# Altium PCB PDB - PCB.PcbDoc
Units mil, origin at the board's own origin, x right, y up, seen from the top; angles counter-clockwise.
Board outline 6000 x 4000 mil, 2 copper layers (Top Layer, Bottom Layer); 27 components, 15 nets, 89 pads, 0 vias.
Unrouted connection lines stored in the file: 54.
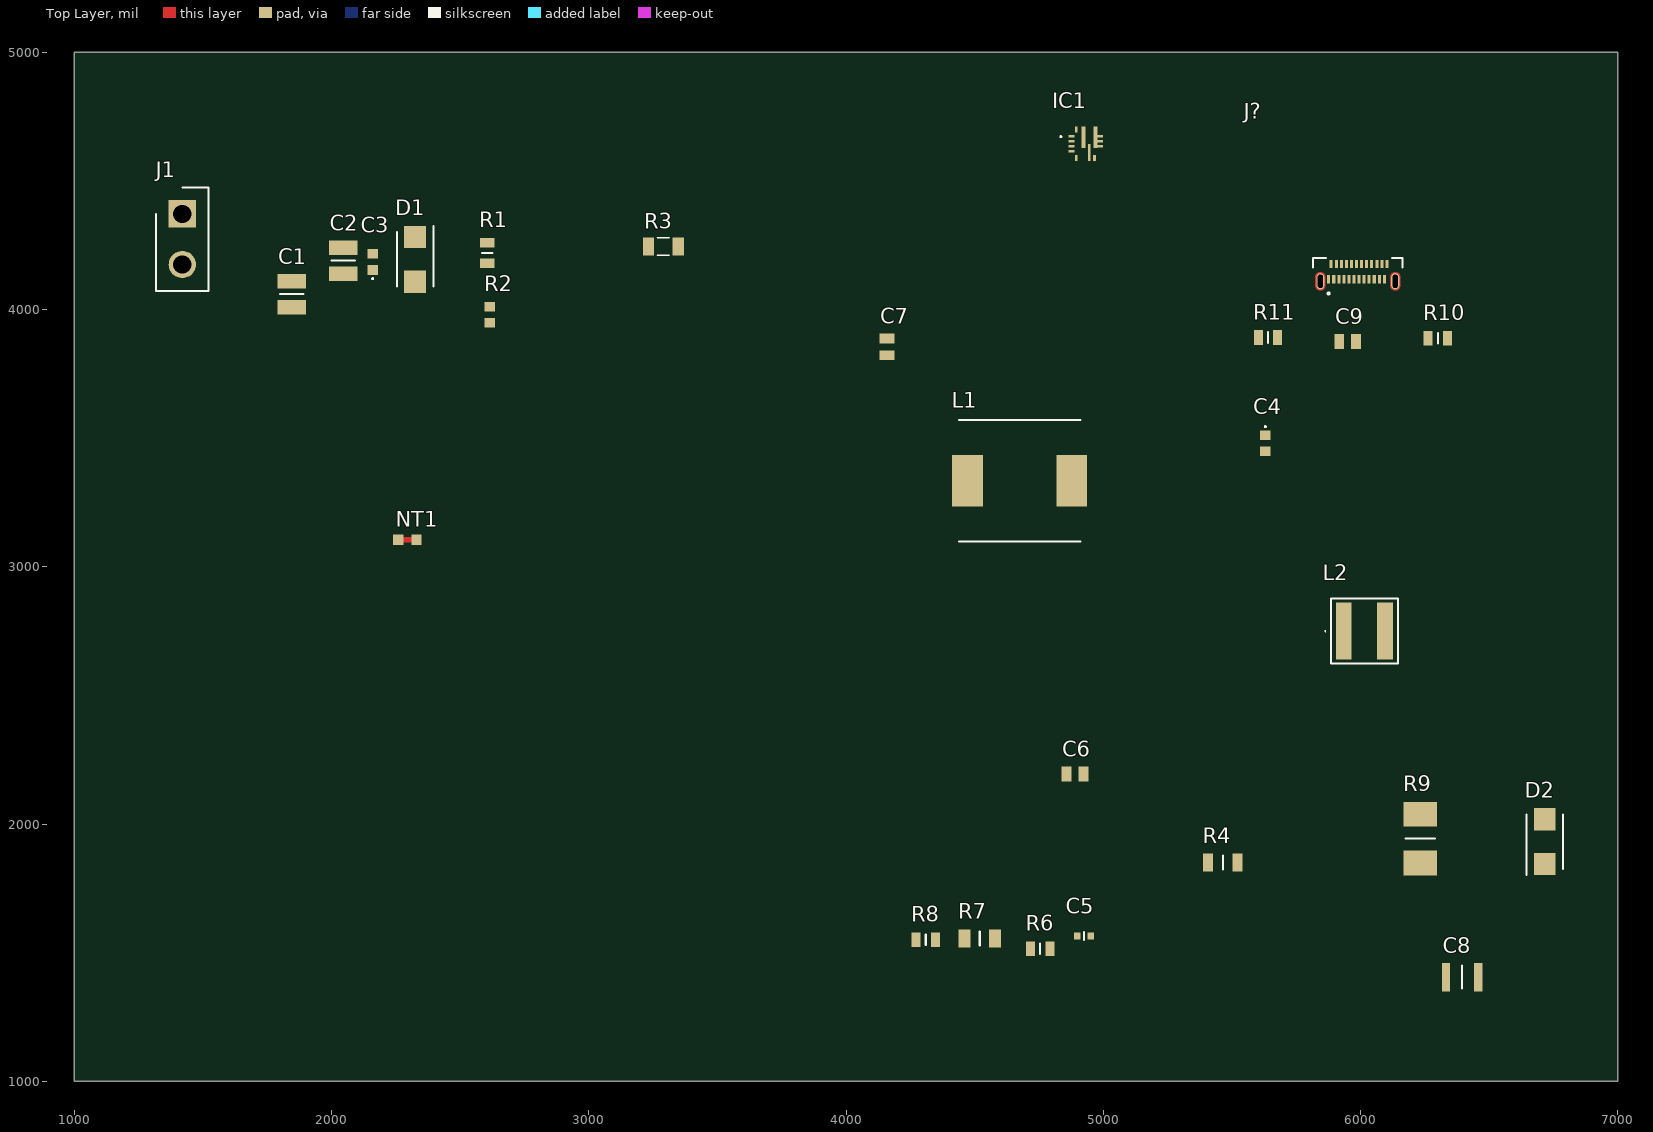
[diagram p0: Top Layer view]
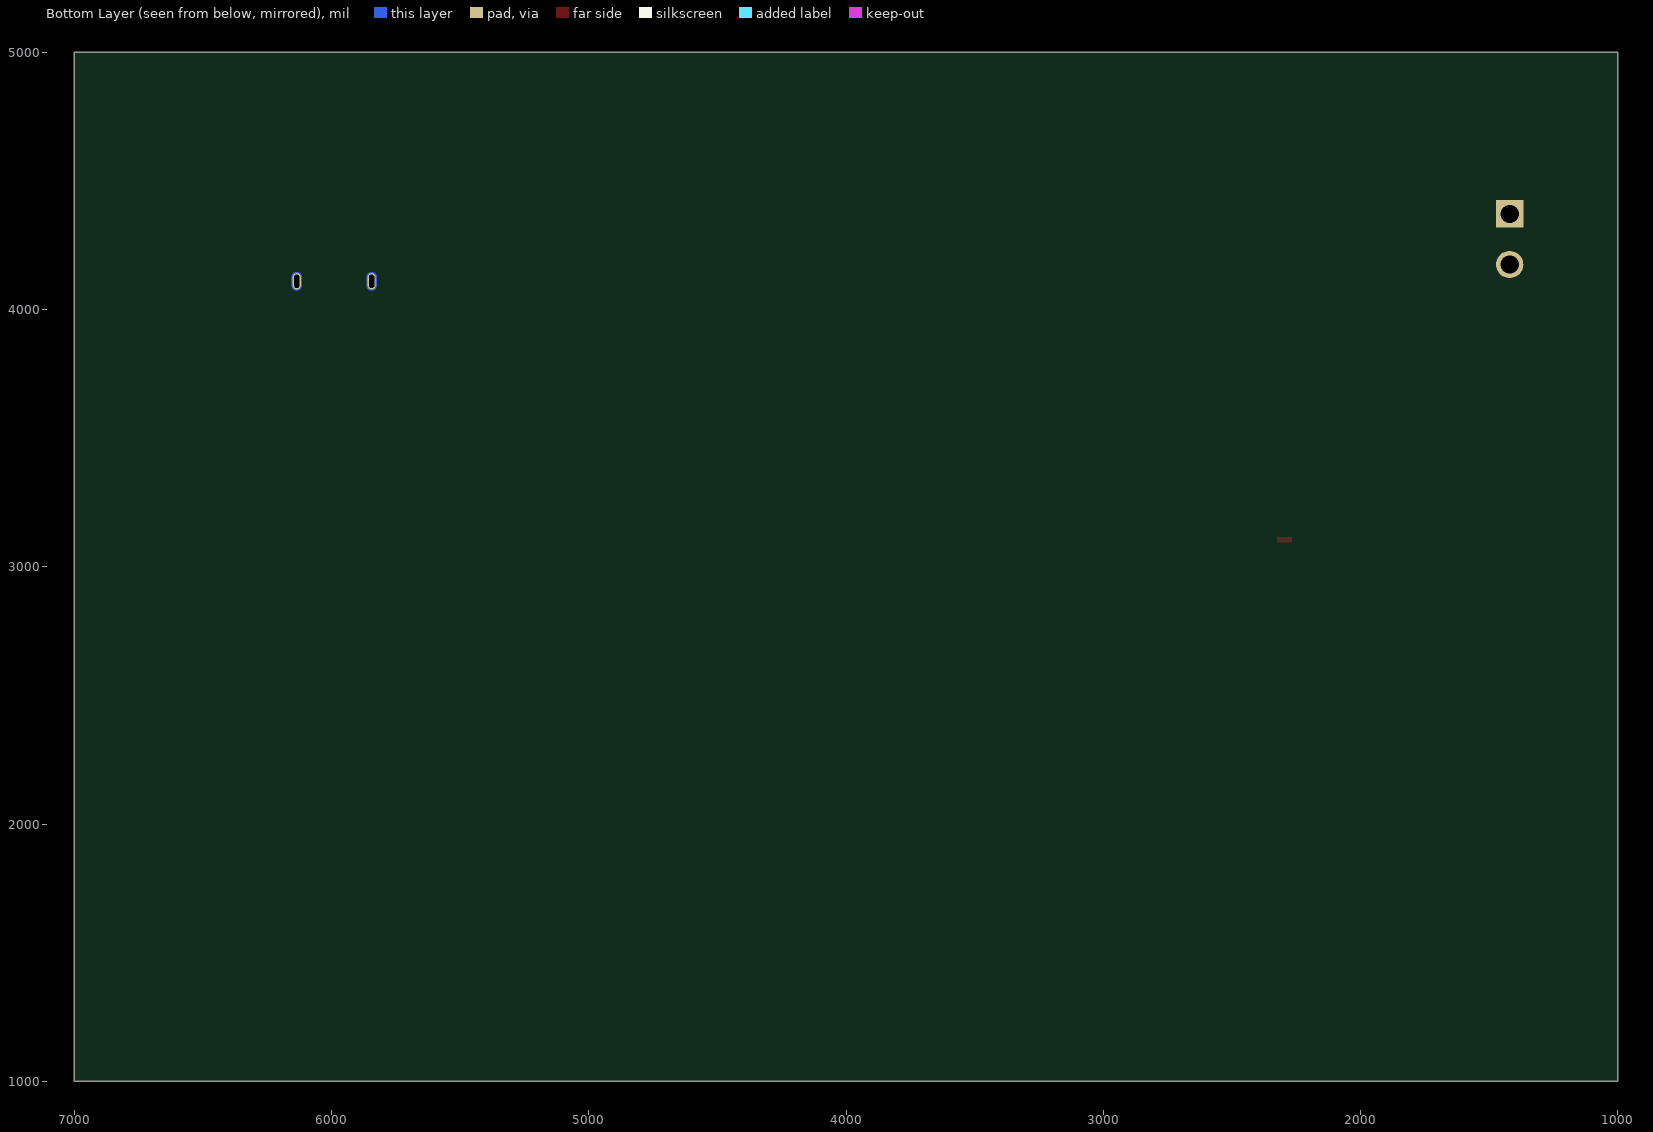
[diagram p1: Bottom Layer view, seen from below]

## Layer stack, top to bottom
Top Solder: solder mask 0.4, Solder Resist, Dk 3.5
Top Layer: signal copper 1.4
Dielectric 1: dielectric 12.6, FR-4, Dk 4.8
Bottom Layer: signal copper 1.4
Bottom Solder: solder mask 0.4, Solder Resist, Dk 3.5

## Board outline
1000,1000 7000,1000 7000,5000 1000,5000

## Design rules (kind name [scope] priority, off if disabled: settings)
Clearance [All] p1: gap=10 ignorepadtopadclearanceinfootprint=FALSE
PolygonConnect [All] p1: connectstyle=Relief reliefconductorwidth=10 reliefentries=4 polygonreliefangle="90 Angle" airgapwidth=10
RoutingVias [All] p1: holewidth=28 width=50 viastyle="Through Hole" minholewidth=28 minwidth=50 maxholewidth=28 maxwidth=50
SolderMaskExpansion [All] p1: expansion=4 istentingtop=FALSE
SupplyNets "Schematic Supply Nets" [InNet('VCC')] p1: voltage=0.000
Width [All] p1: maxlimit=10 minlimit=10 preferedwidth=10
30 further rules are at their usual default settings.

## Components (designator, comment, footprint, x,y, rotation, side; value= is the part's Value field where it differs from the comment)
C1 "10uF" CAPC3225X280N 1845,4060 r90 top
C2 "10uF" CAPC3225X280N 2045,4190 r90 top
C3 "0.1uF" C0603 2160,4185 r90 top
C4 "0.1uF" C0603 5630,3480 r270 top
C5 "100pF" GRM1885C1H101JA01D 4925,1565 r0 top
C6 "22uF" CAPC2012X145N 4890,2195 r0 top
C7 "22uF" CAPC2012X145N 4160,3855 r90 top
C8 "1.5uF" CAPC3225X200N 6395,1405 r0 top
C9 "22uF" CAPC2012X145N 5949.9,3875.7 r0 top
D1 "Diode" DIOM5436X244N 2325,4195 r270 top
D2 "Diode" DIOM5436X244N 6716.1,1931.4 r90 top
IC1 "TPS56637RPAR" TPS56637RPAR 4931.83,4644.46 r0 top
J1 "XT30UPB-M" SHDR2W160P0X500_1X2_1020X520X1070P 1420,4371.85 r270 top
J? "USB4155-03-C_REVA" GCT_USB4155-03-C_REVA 5989.59,4147.17 r180 top
L1 "4.6uH" INDM120120X800N 4675,3335 r0 top
L2 "6.8uH" ASPIF60606R8MT 6015.28,2750 r0 top
NT1 "NetTie" NetTie 2295,3105 r180 top net-tie
R1 "169k" RESC2012X50N 2605,4220 r90 top
R2 "36.1k" RESC1608X51N 2615,3980 r90 top
R3 "100k" RESC3216X71N 3290,4245 r0 top
R4 "49.9" RESC3016X65N 5465,1850 r0 top
R6 "20k" RESC2012X60N 4755,1515 r0 top
R7 "75k" RESC3216X75N 4520,1555 r0 top
R8 "10k" RESC2012X60N 4310,1550 r0 top
R9 "1.5" RESC6331X80N 6232.5,1943.1 r90 top
R10 "10k" RESC2012X60N 6300.6,3887.9 r0 top
R11 "10k" RESC2012X60N 5640.4,3891 r0 top

## Footprints (in the part's own frame and the unit in brackets; to place one, negate y for a bottom-side part, rotate by r counter-clockwise, add the part's x,y. Pads: shape width x height; smd on the part's side, far side on the other; paste and mask are expansions set on the pad)
ASPIF60606R8MT [mm]
  rect 1.55x5.6 smd: 1(-2.025,0) 2(2.025,0)
  silkscreen extent -3.9,-3.2 3.3,3.2, body extent -3.3,-3.2 3.3,3.2, height 6.1
C0603 [mm]
  rect 0.95x1 smd: 1(-0.8,0) 2(0.8,0)
  silkscreen extent -1.7,-0.05 -1.6,0.05, body extent -0.87,-0.48 0.88,0.47, height 0.87
CAPC2012X145N [mm]
  rect 0.97x1.47 smd: 1(-0.83,0) 2(0.83,0)
  body extent -1,-0.63 1,0.63, height 1.45
CAPC3225X200N [mm]
  rect 0.81x2.82 smd: 1(-1.6,0) 2(1.6,0)
  silkscreen extent 0,-1.15 0,1.15, body extent -1.6,-1.25 1.6,1.25, height 2.5
CAPC3225X280N [mm]
  rect 1.43x2.82 smd: 1(-1.29,0) 2(1.29,0)
  silkscreen extent 0,-1.15 0,1.15, body extent -1.6,-1.25 1.6,1.25, height 2.8
DIOM5436X244N [mm]
  rect 2.2x2.15 smd: 1(-2.2,0) 2(2.2,0)
  silkscreen extent -3.27,-1.81 2.7,1.81, body extent -2.7,-1.81 2.7,1.81, height 2.31
GCT_USB4155-03-C_REVA [mm]
  rect 0.3x0.8 smd: A1(2.875,0.75) A2(2.375,0.75) A3(1.875,0.75) A4(1.375,0.75) A5(0.875,0.75) A6(0.375,0.75) A7(-0.125,0.75) A8(-0.625,0.75) A9(-1.125,0.75) A10(-1.625,0.75) A11(-2.125,0.75) A12(-2.625,0.75) B1(-2.875,-0.75) B2(-2.375,-0.75) B3(-1.875,-0.75) B4(-1.375,-0.75) B5(-0.875,-0.75) B6(-0.375,-0.75) B7(0.125,-0.75) B8(0.625,-0.75) B9(1.125,-0.75) B10(1.625,-0.75) B11(2.125,-0.75) B12(2.625,-0.75)
  oval 0.8x1.6 hole 0.5 slot 1.3 at 90 deg mask+0: S1(-3.7,0.95) S2(3.7,0.95)
  Top Layer region: -3.674,1.849 -3.648,1.847 -3.622,1.844 -3.596,1.839 -3.571,1.833 -3.545,1.826 -3.521,1.817 -3.497,1.807 -3.473,1.796 -3.45,1.783 -3.428,1.769 -3.406,1.755 -3.385,1.739 -3.365,1.722 -3.346,1.704 -3.328,1.685 -3.311,1.665 -3.295,1.644 -3.281,1.622 -3.267,1.6 -3.254,1.577 -3.243,1.553 -3.233,1.529 -3.224,1.505 -3.217,1.479 -3.211,1.454 -3.206,1.428 -3.203,1.402 -3.201,1.376 -3.2,1.35 -3.2,0.55 -3.201,0.524 -3.203,0.498 -3.206,0.472 -3.211,0.446 -3.217,0.421 -3.224,0.395 -3.233,0.371 -3.243,0.347 -3.254,0.323 -3.267,0.3 -3.281,0.278 -3.295,0.256 -3.311,0.235 -3.328,0.215 -3.346,0.196 -3.365,0.178 -3.385,0.161 -3.406,0.145 -3.428,0.131 -3.45,0.117 -3.473,0.104 -3.497,0.093 -3.521,0.083 -3.545,0.074 -3.571,0.067 -3.596,0.061 -3.622,0.056 -3.648,0.053 -3.674,0.051 -3.7,0.05 -3.726,0.051 -3.752,0.053 -3.778,0.056 -3.804,0.061 -3.829,0.067 -3.855,0.074 -3.879,0.083 -3.903,0.093 -3.927,0.104 -3.95,0.117 -3.972,0.131 -3.994,0.145 -4.015,0.161 -4.035,0.178 -4.054,0.196 -4.072,0.215 -4.089,0.235 -4.105,0.256 -4.119,0.278 -4.133,0.3 -4.146,0.323 -4.157,0.347 -4.167,0.371 -4.176,0.395 -4.183,0.421 -4.189,0.446 -4.194,0.472 -4.197,0.498 -4.199,0.524 -4.2,0.55 -4.2,1.35 -4.199,1.376 -4.197,1.402 -4.194,1.428 -4.189,1.454 -4.183,1.479 -4.176,1.505 -4.167,1.529 -4.157,1.553 -4.146,1.577 -4.133,1.6 -4.119,1.622 -4.105,1.644 -4.089,1.665 -4.072,1.685 -4.054,1.704 -4.035,1.722 -4.015,1.739 -3.994,1.755 -3.972,1.769 -3.95,1.783 -3.927,1.796 -3.903,1.807 -3.879,1.817 -3.855,1.826 -3.829,1.833 -3.804,1.839 -3.778,1.844 -3.752,1.847 -3.726,1.849 -3.7,1.85
  Top Layer region: 3.726,1.849 3.752,1.847 3.778,1.844 3.804,1.839 3.829,1.833 3.855,1.826 3.879,1.817 3.903,1.807 3.927,1.796 3.95,1.783 3.972,1.769 3.994,1.755 4.015,1.739 4.035,1.722 4.054,1.704 4.072,1.685 4.089,1.665 4.105,1.644 4.119,1.622 4.133,1.6 4.146,1.577 4.157,1.553 4.167,1.529 4.176,1.505 4.183,1.479 4.189,1.454 4.194,1.428 4.197,1.402 4.199,1.376 4.2,1.35 4.2,0.55 4.199,0.524 4.197,0.498 4.194,0.472 4.189,0.446 4.183,0.421 4.176,0.395 4.167,0.371 4.157,0.347 4.146,0.323 4.133,0.3 4.119,0.278 4.105,0.256 4.089,0.235 4.072,0.215 4.054,0.196 4.035,0.178 4.015,0.161 3.994,0.145 3.972,0.131 3.95,0.117 3.927,0.104 3.903,0.093 3.879,0.083 3.855,0.074 3.829,0.067 3.804,0.061 3.778,0.056 3.752,0.053 3.726,0.051 3.7,0.05 3.674,0.051 3.648,0.053 3.622,0.056 3.596,0.061 3.571,0.067 3.545,0.074 3.521,0.083 3.497,0.093 3.473,0.104 3.45,0.117 3.428,0.131 3.406,0.145 3.385,0.161 3.365,0.178 3.346,0.196 3.328,0.215 3.311,0.235 3.295,0.256 3.281,0.278 3.267,0.3 3.254,0.323 3.243,0.347 3.233,0.371 3.224,0.395 3.217,0.421 3.211,0.446 3.206,0.472 3.203,0.498 3.201,0.524 3.2,0.55 3.2,1.35 3.201,1.376 3.203,1.402 3.206,1.428 3.211,1.454 3.217,1.479 3.224,1.505 3.233,1.529 3.243,1.553 3.254,1.577 3.267,1.6 3.281,1.622 3.295,1.644 3.311,1.665 3.328,1.685 3.346,1.704 3.365,1.722 3.385,1.739 3.406,1.755 3.428,1.769 3.45,1.783 3.473,1.796 3.497,1.807 3.521,1.817 3.545,1.826 3.571,1.833 3.596,1.839 3.622,1.844 3.648,1.847 3.674,1.849 3.7,1.85
  Bottom Layer region: -3.674,1.849 -3.648,1.847 -3.622,1.844 -3.596,1.839 -3.571,1.833 -3.545,1.826 -3.521,1.817 -3.497,1.807 -3.473,1.796 -3.45,1.783 -3.428,1.769 -3.406,1.755 -3.385,1.739 -3.365,1.722 -3.346,1.704 -3.328,1.685 -3.311,1.665 -3.295,1.644 -3.281,1.622 -3.267,1.6 -3.254,1.577 -3.243,1.553 -3.233,1.529 -3.224,1.505 -3.217,1.479 -3.211,1.454 -3.206,1.428 -3.203,1.402 -3.201,1.376 -3.2,1.35 -3.2,0.55 -3.201,0.524 -3.203,0.498 -3.206,0.472 -3.211,0.446 -3.217,0.421 -3.224,0.395 -3.233,0.371 -3.243,0.347 -3.254,0.323 -3.267,0.3 -3.281,0.278 -3.295,0.256 -3.311,0.235 -3.328,0.215 -3.346,0.196 -3.365,0.178 -3.385,0.161 -3.406,0.145 -3.428,0.131 -3.45,0.117 -3.473,0.104 -3.497,0.093 -3.521,0.083 -3.545,0.074 -3.571,0.067 -3.596,0.061 -3.622,0.056 -3.648,0.053 -3.674,0.051 -3.7,0.05 -3.726,0.051 -3.752,0.053 -3.778,0.056 -3.804,0.061 -3.829,0.067 -3.855,0.074 -3.879,0.083 -3.903,0.093 -3.927,0.104 -3.95,0.117 -3.972,0.131 -3.994,0.145 -4.015,0.161 -4.035,0.178 -4.054,0.196 -4.072,0.215 -4.089,0.235 -4.105,0.256 -4.119,0.278 -4.133,0.3 -4.146,0.323 -4.157,0.347 -4.167,0.371 -4.176,0.395 -4.183,0.421 -4.189,0.446 -4.194,0.472 -4.197,0.498 -4.199,0.524 -4.2,0.55 -4.2,1.35 -4.199,1.376 -4.197,1.402 -4.194,1.428 -4.189,1.454 -4.183,1.479 -4.176,1.505 -4.167,1.529 -4.157,1.553 -4.146,1.577 -4.133,1.6 -4.119,1.622 -4.105,1.644 -4.089,1.665 -4.072,1.685 -4.054,1.704 -4.035,1.722 -4.015,1.739 -3.994,1.755 -3.972,1.769 -3.95,1.783 -3.927,1.796 -3.903,1.807 -3.879,1.817 -3.855,1.826 -3.829,1.833 -3.804,1.839 -3.778,1.844 -3.752,1.847 -3.726,1.849 -3.7,1.85
  Bottom Layer region: 3.726,1.849 3.752,1.847 3.778,1.844 3.804,1.839 3.829,1.833 3.855,1.826 3.879,1.817 3.903,1.807 3.927,1.796 3.95,1.783 3.972,1.769 3.994,1.755 4.015,1.739 4.035,1.722 4.054,1.704 4.072,1.685 4.089,1.665 4.105,1.644 4.119,1.622 4.133,1.6 4.146,1.577 4.157,1.553 4.167,1.529 4.176,1.505 4.183,1.479 4.189,1.454 4.194,1.428 4.197,1.402 4.199,1.376 4.2,1.35 4.2,0.55 4.199,0.524 4.197,0.498 4.194,0.472 4.189,0.446 4.183,0.421 4.176,0.395 4.167,0.371 4.157,0.347 4.146,0.323 4.133,0.3 4.119,0.278 4.105,0.256 4.089,0.235 4.072,0.215 4.054,0.196 4.035,0.178 4.015,0.161 3.994,0.145 3.972,0.131 3.95,0.117 3.927,0.104 3.903,0.093 3.879,0.083 3.855,0.074 3.829,0.067 3.804,0.061 3.778,0.056 3.752,0.053 3.726,0.051 3.7,0.05 3.674,0.051 3.648,0.053 3.622,0.056 3.596,0.061 3.571,0.067 3.545,0.074 3.521,0.083 3.497,0.093 3.473,0.104 3.45,0.117 3.428,0.131 3.406,0.145 3.385,0.161 3.365,0.178 3.346,0.196 3.328,0.215 3.311,0.235 3.295,0.256 3.281,0.278 3.267,0.3 3.254,0.323 3.243,0.347 3.233,0.371 3.224,0.395 3.217,0.421 3.211,0.446 3.206,0.472 3.203,0.498 3.201,0.524 3.2,0.55 3.2,1.35 3.201,1.376 3.203,1.402 3.206,1.428 3.211,1.454 3.217,1.479 3.224,1.505 3.233,1.529 3.243,1.553 3.254,1.577 3.267,1.6 3.281,1.622 3.295,1.644 3.311,1.665 3.328,1.685 3.346,1.704 3.365,1.722 3.385,1.739 3.406,1.755 3.428,1.769 3.45,1.783 3.473,1.796 3.497,1.807 3.521,1.817 3.545,1.826 3.571,1.833 3.596,1.839 3.622,1.844 3.648,1.847 3.674,1.849 3.7,1.85
  silkscreen extent -4.4,-1.35 4.4,2.25, body extent -4.4,-14.05 4.4,1.45, height 1.45
GRM1885C1H101JA01D [mm]
  rect 0.65x0.7 smd: 1(-0.675,0) 2(0.675,0)
  silkscreen extent 0,-0.4 0,0.4, body extent -0.8,-0.45 0.8,0.45, height 0.8
INDM120120X800N [mm]
  rect 3.05x5.1 smd: 1(-5.15,0) 2(5.15,0)
  silkscreen extent -6,-6 6,6, body extent -6,-6 6,6, height 8
NetTie [mm]
  rect 1x1 smd mask-10: 1(-0.9,0) 2(0.9,0)
  Top Layer region: -0.75,-0.25 0.75,-0.25 0.75,0.25 -0.75,0.25
RESC1608X51N [mm]
  rect 0.95x1 smd: 1(-0.8,0) 2(0.8,0)
  body extent -0.81,-0.41 0.81,0.41, height 0.51
RESC2012X50N [mm]
  rect 0.95x1.45 smd: 1(-1,0) 2(1,0)
  silkscreen extent 0,-0.53 0,0.53, body extent -1.02,-0.63 1.02,0.63, height 0.5
RESC2012X60N [mm]
  rect 0.9x1.45 smd: 1(-0.95,0) 2(0.95,0)
  silkscreen extent 0,-0.53 0,0.53, body extent -1,-0.63 1,0.63, height 0.6
RESC3016X65N [mm]
  rect 1x1.75 smd: 1(-1.45,0) 2(1.45,0)
  silkscreen extent 0,-0.67 0,0.67, body extent -1.52,-0.78 1.53,0.77, height 0.55
RESC3216X71N [mil]
  rect 44x69 smd: 1(-58,0) 2(58,0)
  silkscreen extent -23,-34 23,34, body extent -61,-31 61,31, height 24
RESC3216X75N [mm]
  rect 1.2x1.8 smd: 1(-1.5,0) 2(1.5,0)
  silkscreen extent 0,-0.7 0,0.7, body extent -1.6,-0.8 1.6,0.8, height 0.75
RESC6331X80N [mm]
  rect 2.45x3.3 smd: 1(-2.4,0) 2(2.4,0)
  silkscreen extent 0,-1.45 0,1.45, body extent -3.15,-1.55 3.15,1.55, height 0.8
SHDR2W160P0X500_1X2_1020X520X1070P [mm]
  rect 2.7x2.7 hole 1.8: 1(0,0)
  round 2.7 hole 1.8: 2(5,0)
  silkscreen extent -2.6,-2.6 7.6,2.6, body extent -2.6,-2.6 7.6,2.6, height 10.7
TPS56637RPAR [mm]
  rect 0.6x0.25 smd mask+0: 1(-1.4,0.75) 2(-1.4,0.25) 3(-1.4,-0.25) 4(-1.4,-0.75)
  rect 0.25x0.6 smd mask+0: 5(-0.93,-1.4) 7(0.87,-1.4) 10(-0.93,1.4)
  rect 0.25x1.7 smd mask+0: 6(0.37,-0.85)
  rect 0.4x2.1 smd mask+0: 8(0.95,0.65) 9(-0.21,0.65)
  rect 0.56x0.25 smd mask+0: 11(1.42,-0.25) 12(1.42,0.25) 13(1.42,0.75)
  silkscreen extent -2.5,0.65 -2.4,0.75, body extent -1.55,-1.55 1.55,1.55, height 1

## Part data
C1 C2: library part AGC1210X7R500-106KNE, "Capacitor", Manufacturer_Name=Venkel, Datasheet Link=https://data.venkel.com/documents/agc-series?force=1, Height=2.8mm, Manufacturer_Part_Number=AGC1210X7R500-106KNE
C3 C4: library part C0603C104K5RACTU, "Capacitor", Manufacturer_Name=KEMET, Mouser Part Number=80-C0603C104K5R, Arrow Part Number=C0603C104K5RACTU, Arrow Price/Stock=https://www.arrow.com/en/products/c0603c104k5ractu/kemet-corporation?utm_currency=USD&region=nac, Datasheet Link=https://content.kemet.com/datasheets/KEM_C1002_X7R_SMD.pdf, Height=0.87mm, Manufacturer_Part_Number=C0603C104K5RACTU, Mouser Price/Stock=https://www.mouser.co.uk/ProductDetail/KEMET/C0603C104K5RACTU?qs=l5k%252BbMnNDkkVcnZPSAaaiQ%3D%3D
C5: library part GRM1885C1H101JA01D, "Capacitor", Manufacturer_Name="Murata Electronics", Mouser Part Number=81-GRM39C101J50, Arrow Part Number=GRM1885C1H101JA01D, Arrow Price/Stock=https://www.arrow.com/en/products/grm1885c1h101ja01d/murata-manufacturing?utm_currency=USD&region=europe, Datasheet Link=https://search.murata.co.jp/Ceramy/image/img/A01X/G101/ENG/GRM1885C1H101JA01-01A.pdf, Height=0.9mm, Manufacturer_Part_Number=GRM1885C1H101JA01D, Mouser Price/Stock=https://www.mouser.co.uk/ProductDetail/Murata-Electronics/GRM1885C1H101JA01D?qs=H3lwsW1hsDt1I4guwPQ00A%3D%3D
C6 C7 C9: library part C2012X5R1V226M125AC, "Capacitor, 35V", Manufacturer_Name=TDK, Mouser Part Number=810-C2012X5R1V226MAC, Arrow Part Number=C2012X5R1V226M125AC, Arrow Price/Stock=https://www.arrow.com/en/products/c2012x5r1v226m125ac/tdk?utm_currency=USD&region=nac, Datasheet Link=https://product.tdk.com/info/en/catalog/datasheets/mlcc_commercial_midvoltage_en.pdf, Height=1.45mm, Manufacturer_Part_Number=C2012X5R1V226M125AC, Mouser Price/Stock=https://www.mouser.co.uk/ProductDetail/TDK/C2012X5R1V226M125AC?qs=6JAMGB%252BEdkyUk0d2Mu2IrQ%3D%3D
C8: library part C3225X7R2A155K200AB, "Capacitor", Manufacturer_Name=TDK, Mouser Part Number=810-C3225X7R2A155K2B, Arrow Part Number=C3225X7R2A155K200AB, Arrow Price/Stock=https://www.arrow.com/en/products/c3225x7r2a155k200ab/tdk, Datasheet Link=https://product.tdk.com/info/en/catalog/datasheets/mlcc_commercial_midvoltage_en.pdf, Height=2mm, Manufacturer_Part_Number=C3225X7R2A155K200AB, Mouser Price/Stock=https://www.mouser.co.uk/ProductDetail/TDK/C3225X7R2A155K200AB?qs=xLDY6iXSiQYhBLhobQfC5A%3D%3D
D1 D2: library part SMBJ26A, "TVS Diode (Uni-directional)", Manufacturer_Name=Bourns, Mouser Part Number=652-SMBJ26A, Arrow Part Number=SMBJ26A, Arrow Price/Stock=https://www.arrow.com/en/products/smbj26a/bourns?utm_currency=USD&region=nac, Datasheet Link=https://www.bourns.com/docs/product-datasheets/smbj.pdf?sfvrsn=34552159_17, Height=2.44mm, Manufacturer_Part_Number=SMBJ26A, Mouser Price/Stock=https://www.mouser.co.uk/ProductDetail/Bourns/SMBJ26A?qs=%252Bf8Cd6aE5bzyuNXx4QjGJA%3D%3D
IC1: "Integrated Circuit", Manufacturer_Name="Texas Instruments", Mouser Part Number=595-TPS56637RPAR, Arrow Part Number=TPS56637RPAR, Arrow Price/Stock=https://www.arrow.com/en/products/tps56637rpar/texas-instruments?utm_currency=USD&region=nac, Datasheet Link=https://www.ti.com/lit/gpn/TPS56637, Height=1mm, Manufacturer_Part_Number=TPS56637RPAR, Mouser Price/Stock=https://www.mouser.co.uk/ProductDetail/Texas-Instruments/TPS56637RPAR?qs=9r4v7xj2LnkQ0Y9HL0qmSA%3D%3D
J1: "Connector", Manufacturer_Name=Amass, Datasheet Link=https://www.tme.eu/Document/4acc913878197f8c2e30d4b8cdc47230/XT30UPB%20SPEC.pdf, Height=10.7mm, Manufacturer_Part_Number=XT30UPB-M
J?: Package=None, Availability=Unavailable, MP=USB4155-03-C_REVA, Price=None
L1: library part CDRH127_LDNP-4R6NC, "Inductor", Arrow Part Number=CDRH127/LDNP-4R6NC, Manufacturer_Name=Sumida, Mouser Part Number=851-CDRH127LDNP4R6NC, Arrow Price/Stock=https://www.arrow.com/en/products/cdrh127ldnp-4r6nc/sumida?utm_currency=USD&region=nac, Datasheet Link=https://datasheet.datasheetarchive.com/originals/distributors/Datasheets-DGA11/2188085.pdf, Height=8mm, Manufacturer_Part_Number=CDRH127/LDNP-4R6NC, Mouser Price/Stock=https://www.mouser.co.uk/ProductDetail/Sumida/CDRH127-LDNP-4R6NC?qs=WUEw9%252Ba7LqamztZJnA%2FuRg%3D%3D
L2: library part ASPI-F6060-6R8M-T, "Inductor", Manufacturer_Name=ABRACON, Datasheet Link=https://abracon.com/datasheets/ASPI-F6060.pdf, Height=6mm, Manufacturer_Part_Number=ASPI-F6060-6R8M-T
NT1: "Net Tie"
R1: library part CRCW08051K96FKEA, "Resistor", Manufacturer_Name=Vishay, Mouser Part Number=71-CRCW08051K96FKEA, Arrow Part Number=CRCW08051K96FKEA, Arrow Price/Stock=https://www.arrow.com/en/products/crcw08051k96fkea/vishay?region=nac, Datasheet Link=http://www.vishay.com/docs/20035/dcrcwe3.pdf, Height=0.5mm, Manufacturer_Part_Number=CRCW08051K96FKEA, Mouser Price/Stock=https://www.mouser.co.uk/ProductDetail/Vishay-Dale/CRCW08051K96FKEA?qs=1CkV0QOCgMpA%2F6GTgXIN%2Fg%3D%3D
R2: library part PTN0603E3612BST1, "Resistor", Manufacturer_Name=Vishay, Datasheet Link=http://www.vishay.com/docs/60026/ptn.pdf, Height=0.508mm, Manufacturer_Part_Number=PTN0603E3612BST1
R3: library part TNPW1206100KBEEA, "Resistor", Manufacturer_Name=Vishay, Mouser Part Number=71-TNPW1206100KBEEA, Arrow Part Number=TNPW1206100KBEEA, Arrow Price/Stock=https://www.arrow.com/en/products/tnpw1206100kbeea/vishay, Datasheet Link=http://componentsearchengine.com/Datasheets/1/TNPW1206100KBEEA.pdf, Manufacturer_Part_Number=TNPW1206100KBEEA, Mouser Price/Stock=https://www.mouser.co.uk/ProductDetail/Vishay-Dale/TNPW1206100KBEEA?qs=3e%2FgEgHITqD1A8tWsKQhKA%3D%3D
R4: library part RNCF1206TKY49R9, "Resistor", Manufacturer_Name="Stackpole Electronics", Mouser Part Number=708-RNCF1206TKY49R9, Arrow Part Number=RNCF1206TKY49R9, Arrow Price/Stock=https://www.arrow.com/en/products/rncf1206tky49r9/stackpole-electronics?region=nac, Datasheet Link=https://www.seielect.com/catalog/sei-rncf.pdf, Height=0.65mm, Manufacturer_Part_Number=RNCF1206TKY49R9, Mouser Price/Stock=https://www.mouser.co.uk/ProductDetail/SEI-Stackpole/RNCF1206TKY49R9?qs=IPgv5n7u5QbrkyDMq71eTQ%3D%3D
R6: library part RK73H2ATTD2002F, "Resistor", Manufacturer_Name="KOA Speer", Mouser Part Number=660-RK73H2ATTD2002F, Datasheet Link=http://www.koaspeer.com/catimages/Products/RK73H/RK73H.pdf, Height=0.6mm, Manufacturer_Part_Number=RK73H2ATTD2002F, Mouser Price/Stock=https://www.mouser.com/Search/Refine.aspx?Keyword=660-RK73H2ATTD2002F
R7: library part CR1206-FX-7502ELF, "Resistor", Manufacturer_Name=Bourns, Mouser Part Number=652-CR1206FX-7502ELF, Datasheet Link=http://www.bourns.com/data/global/pdfs/CHPREZTR.pdf, Height=0.75mm, Manufacturer_Part_Number=CR1206-FX-7502ELF, Mouser Price/Stock=https://www.mouser.co.uk/ProductDetail/Bourns/CR1206-FX-7502ELF?qs=x5wsLs3ZZ83CFlrcVX0CWw%3D%3D
R8 R10 R11: library part CRCW080510K0FKEAHP, "Resistor", Manufacturer_Name=Vishay, Mouser Part Number=71-CRCW080510K0FKEAH, Arrow Part Number=CRCW080510K0FKEAHP, Arrow Price/Stock=https://www.arrow.com/en/products/crcw080510k0fkeahp/vishay?utm_currency=USD&region=europe, ClassName=PowerModul, Datasheet Link=https://componentsearchengine.com/Datasheets/1/CRCW08051R00FKEAHP.pdf, Height=0.6mm, Manufacturer_Part_Number=CRCW080510K0FKEAHP, Mouser Price/Stock=https://www.mouser.co.uk/ProductDetail/Vishay-Dale/CRCW080510K0FKEAHP?qs=FlFvgi4rxBybVOW6oiRQjA%3D%3D
R9: library part CRM2512-JW-1R5ELF, "Resistor 2W", Manufacturer_Name=Bourns, Mouser Part Number=652-CRM2512JW1R5ELF, Datasheet Link=http://www.bourns.com/data/global/pdfs/CRM0805_1206_2010.pdf, Height=0.8mm, Manufacturer_Part_Number=CRM2512-JW-1R5ELF, Mouser Price/Stock=https://www.mouser.co.uk/ProductDetail/Bourns/CRM2512-JW-1R5ELF?qs=Zq5ylnUbLm5fOyBG7EkMBA%3D%3D

## Nets (pads, with @x,y where several pads share a name; then routed paths per layer and width w, separated by ;. In a path a pad name is that pad's centre, name@x,y a point inside that pad or via, vN(x,y) a via of type N, cw(c..) or ccw(c..) an arc to the next point about the centre after c; other vN are vias at no path point)
AGND: IC1.3 IC1.10 NT1.1 R2.1 R8.1
NetC4_1: C4.1 IC1.7
NetC4_2: C4.2 IC1.6 L1.2
NetC5_1: C5.1 R6.2
NetC5_2: C5.2 IC1.2 R7.1 R8.2
NetC6_2: C6.2 C7.2 L1.1 L2.1 R4.2
NetC8_2: C8.2 D2.1 J?.A4 J?.A9 J?.B4 J?.B9 L2.2 R9.2 R10.1 R11.2
NetC9_2: C9.2 R9.1
NetIC1_1: IC1.1 R1.1 R2.2
NetIC1_4: IC1.4 R3.2
NetJ?_A5: J?.A5 R10.2
NetJ?_B5: J?.B5 R11.1
NetR4_1: R4.1 R6.1 R7.2
PGND: C1.1 C2.1 C3.1 C6.1 C7.1 C8.1 C9.1 D1.2 D2.2 IC1.9 J1.2 J?.A1 J?.A12 J?.B1 J?.B12 NT1.2
VCC: C1.2 C2.2 C3.2 D1.1 IC1.8 IC1.11 IC1.12 IC1.13 J1.1 R1.2 R3.1
pads on no net: IC1.5 J?.A2 J?.A3 J?.A6 J?.A7 J?.A8 J?.A10 J?.A11 J?.B2 J?.B3 J?.B6 J?.B7 J?.B8 J?.B10 J?.B11 J?.S1 J?.S2

## Text inside footprints (layer, text, board x,y; h text height)
J?: Mechanical 13 "PCB Edge" at 5792.74,4190.48 h32 r180